# EAGLE board doorduino3 (EAGLE 7.4.0)
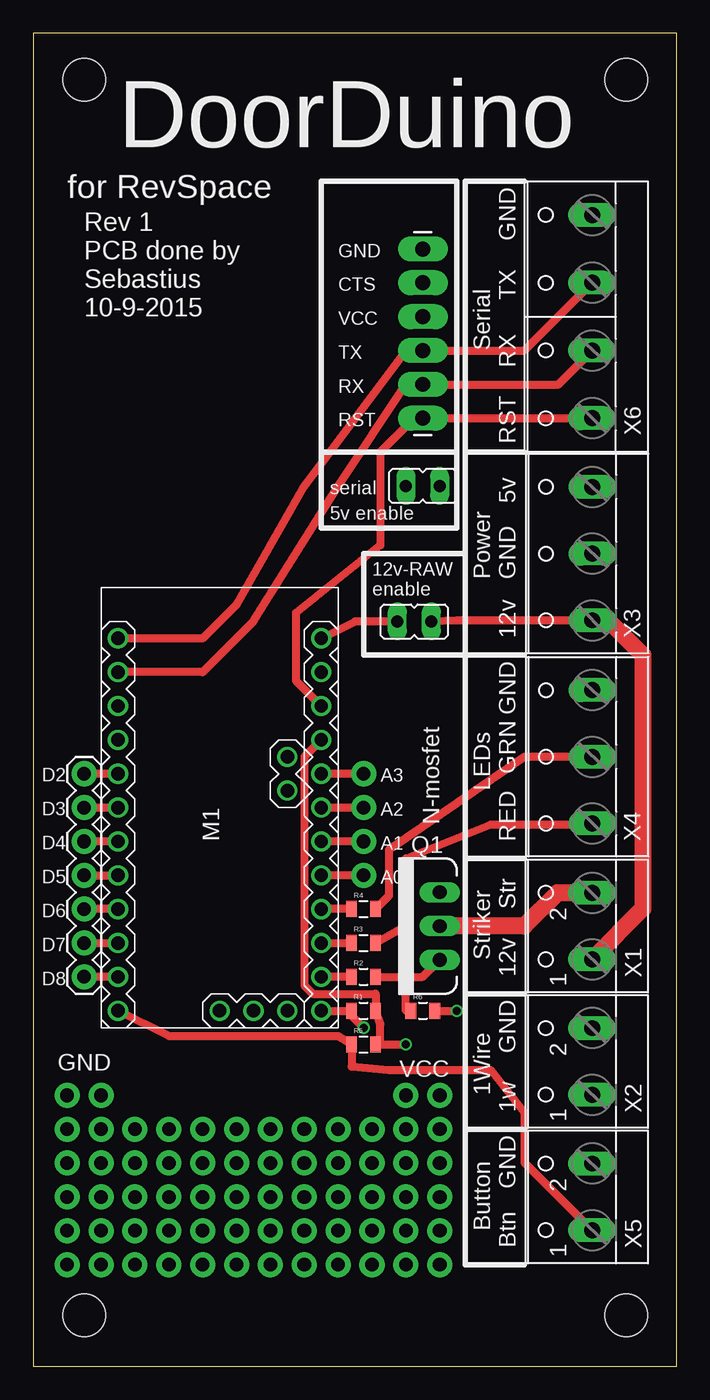
[diagram p0: board, top side]
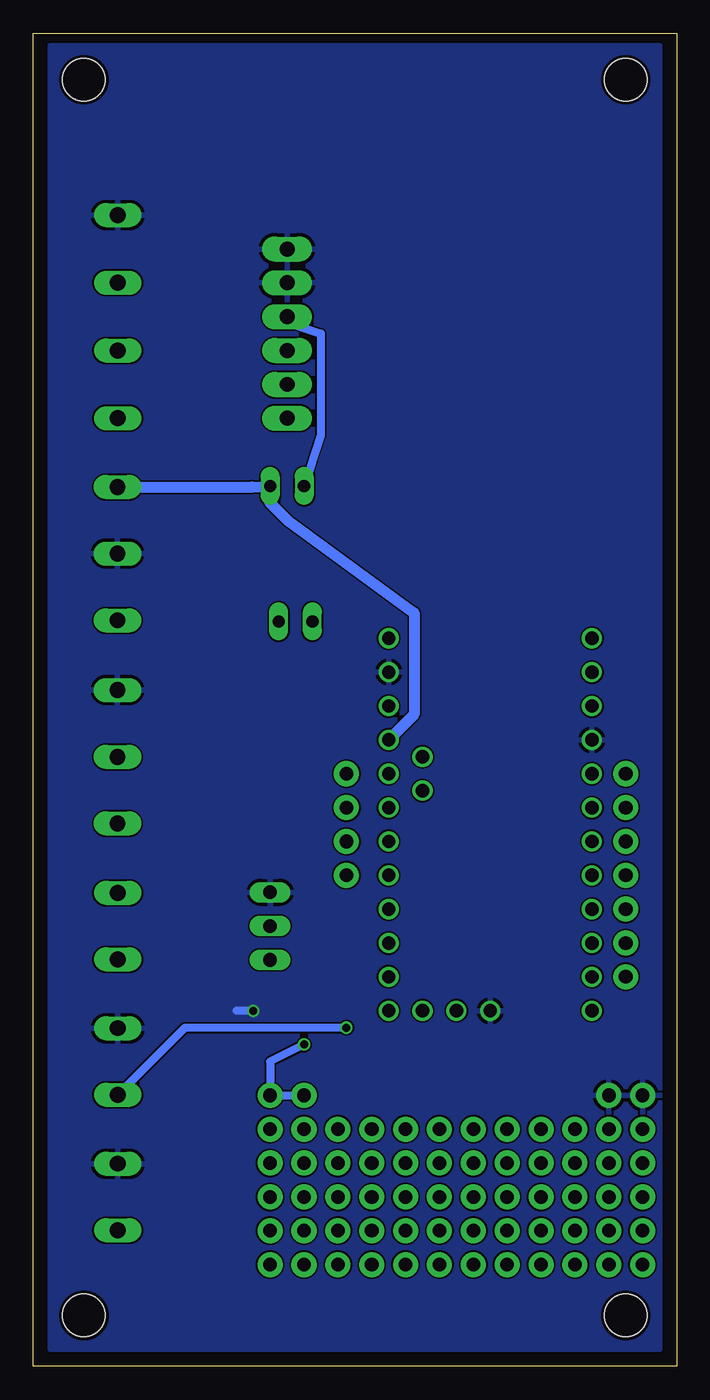
[diagram p1: board, bottom side, seen from below]

Size 48.24 x 100 mm. Coordinates in mm from the lower left corner, seen from the top.
Outline: 0,0 48.24,0 48.24,100 0,100 0,0
Copper layers (1*16): Top 0.035mm / dielectric 1.5mm / Bottom 0.035mm
Design rules "dirt_cheap_dirty_boards.v1": minimum track width 5mil, minimum drill 12mil, track to track 5mil, track to pad 5mil, pad to pad 5mil, via to via 5mil, smd to smd 0mil, copper to edge 10mil, drill to drill 10mil, minimum pad ring 10mil, minimum via ring 6mil, stop-mask expansion 2mil, vias tented up to drill 25mil, thermal gap 10mil
Holes 3.2 mm at 3.81,96.52 44.45,96.52 3.81,3.81 44.45,3.81

## Footprints (pad centres in the part's own frame; a part is rotated, then mirrored left to right if it is on the bottom)
1X02_NO_SILK = drill 1.016 pad 1.88: 1 0,0; 2 2.54,0
JP1 = drill 0.914 long: 1 0,-1.27; 2 0,1.27
1X06_LONGPADS = drill 1.118 pad 1.88 long: 1 0,0; 2 2.54,0; 3 5.08,0; 4 7.62,0; 5 10.16,0; 6 12.7,0
1X12_NO_SILK = drill 1.016 pad 1.88: 1 0,0; 2 2.54,0; 3 5.08,0; 4 7.62,0; 5 10.16,0; 6 12.7,0; 7 15.24,0; 8 17.78,0; 9 20.32,0; 10 22.86,0; 11 25.4,0; 12 27.94,0
1X07 = drill 1.016 pad 1.88: 1 0,0; 2 2.54,0; 3 5.08,0; 4 7.62,0; 5 10.16,0; 6 12.7,0; 7 15.24,0
1X04_NO_SILK_ALL_ROUND = drill 1.016 pad 1.88: 1 0,0; 2 2.54,0; 3 5.08,0; 4 7.62,0
ARDUINO-PRO-MINI#NP = drill 1: J2.1 -1.27,5.08; J2.2 -3.81,5.08; J3.1 15.24,0; J3.2 15.24,2.54; J3.3 15.24,5.08; J6.1 -12.7,7.62; J6.2 -10.16,7.62; J6.3 -7.62,7.62; J6.4 -5.08,7.62; J6.5 -2.54,7.62; J6.6 0,7.62; J6.7 2.54,7.62; J6.8 5.08,7.62; J6.9 7.62,7.62; J6.10 10.16,7.62; J6.11 12.7,7.62; J6.12 15.24,7.62; J7.1 15.24,-7.62; J7.2 12.7,-7.62; J7.3 10.16,-7.62; J7.4 7.62,-7.62; J7.5 5.08,-7.62; J7.6 2.54,-7.62; J7.7 0,-7.62; J7.8 -2.54,-7.62; J7.9 -5.08,-7.62; J7.10 -7.62,-7.62; J7.11 -10.16,-7.62; J7.12 -12.7,-7.62
TO220V = drill 1.016 long: 1 -2.54,0; 2 0,0; 3 2.54,0
0805 = smd 0.8 x 1.2: 1 -0.9,0; 2 0.9,0
W237-102 = drill 1.194 long: 1 -2.5,-1.27; 2 2.5,-1.27
W237-103 = drill 1.194 long: 1 -5,-1.29; 2 0,-1.29; 3 5,-1.29
W237-4P = drill 1.194 long: 1 -7.62,-0.635; 2 -2.54,-0.635; 3 2.54,-0.635; 4 7.62,-0.635

## Placement (x,y rotation side)
GND  [1X02_NO_SILK]  2.54,20.32 0 top
JP1  [JP1]  28.57,55.88 90 top
JP2  SERIAL  [1X06_LONGPADS]  29.21,71.12 90 top
JP3  [JP1]  29.21,66.04 270 top
JP4  [1X12_NO_SILK]  2.54,17.78 0 top
JP5  [1X12_NO_SILK]  2.54,15.24 0 top
JP6  [1X12_NO_SILK]  2.54,12.7 0 top
JP7  [1X12_NO_SILK]  2.54,10.16 0 top
JP8  [1X12_NO_SILK]  2.54,7.62 0 top
JP10  [1X07]  3.81,29.21 90 top
JP11  [1X04_NO_SILK_ALL_ROUND]  24.77,44.45 270 top
M1  ARDUINO-PRO-MINI-5.0V#NP  [ARDUINO-PRO-MINI#NP]  13.97,41.91 270 top
Q1  N-Mosfet  [TO220V]  30.48,33.02 90 top
R1  [0805]  24.77,26.67 0 top
R2  [0805]  24.77,29.21 0 top
R3  [0805]  24.77,31.75 0 top
R4  [0805]  24.77,34.29 0 top
R5  [0805]  24.77,24.13 0 top
R6  [0805]  29.21,26.67 0 top
VCC  [1X02_NO_SILK]  30.48,20.32 180 top
X1  STRIKER  [W237-102]  40.64,33.02 90 top
X2  1WIRE  [W237-102]  40.64,22.86 90 top
X3  Power  [W237-103]  40.64,60.96 90 top
X4  LEDS  [W237-103]  40.64,45.72 90 top
X5  BUTTON  [W237-102]  40.64,12.7 90 top
X6  [W237-4P]  41.27,78.74 90 top

## Library data of the parts
GND JP2 JP4-JP8 JP10 JP11 VCC = SparkFun-Connectors
JP1 JP3 = jumper
M1 = diy-modules
Q1 = SparkFun-DiscreteSemi; PROD_ID: TRANS-10060
R1-R6 = SparkFun-Passives
X1 X2 X5 = con-wago-500; MPN: 237-102; OC_FARNELL: unknown; OC_NEWARK: 70K9898
X3 X4 = con-wago-500; MPN: 237-103; OC_FARNELL: unknown; OC_NEWARK: 18M7116
X6 = con-wago-508; OC_FARNELL: unknown; OC_NEWARK: unknown

## Nets
+12V: JP1.1 X1.1 X3.1
GND: GND.1 GND.2 JP2.5 JP2.6 M1.J3.1 M1.J6.2 M1.J7.9 Q1.3 R6.2 X2.2 X3.2 X4.3 X5.2 X6.4
N$1: JP1.2 M1.J6.1
N$2: M1.J6.12 R1.1 X2.1
N$3: M1.J6.11 R2.1
N$4: Q1.1 R2.2 R6.1
N$5: Q1.2 X1.2
N$6: M1.J6.10 R3.1
N$7: M1.J6.9 R4.1
N$8: R3.2 X4.1
N$9: R4.2 X4.2
N$10: M1.J7.1 R5.1 X5.1
N$11: JP2.3 M1.J7.12 X6.3
N$12: JP2.2 M1.J7.11 X6.2
N$13: JP2.4 JP3.1
N$14: JP2.1 M1.J6.3 X6.1
N$15: JP10.1 M1.J7.2
N$16: JP10.2 M1.J7.3
N$17: JP10.3 M1.J7.4
N$18: JP10.4 M1.J7.5
N$19: JP10.5 M1.J7.6
N$20: JP10.6 M1.J7.7
N$21: JP10.7 M1.J7.8
N$22: JP11.1 M1.J6.5
N$23: JP11.2 M1.J6.6
N$24: JP11.3 M1.J6.7
N$25: JP11.4 M1.J6.8
VCC: JP3.2 M1.J6.4 R1.2 R5.2 VCC.1 VCC.2 X3.3

## Tracks (layer width: path | path; a pad name or v marks a point on that pad's centre or on a via)
+12V
  Top 0.61: X3.1 31.83,55.96 JP1.1
  Top 1.27: X3.1 43.1,55.96 45.72,53.34 45.72,34.33 X1.1
GND  (via drill 0.6)
  Top 0.61: R6.2 v31.75,26.67
  Bottom 0.61: v31.75,26.67 33.02,26.67
  pour Bottom: 1.27,99.06 46.99,99.06 46.99,1.27 1.27,1.27
N$1
  Top 0.61: JP1.2 24.13,55.88 M1.J6.1
N$2  (via drill 0.6)
  Top 0.61: v24.77,25.4 23.86,26.3 R1.1 M1.J6.12
  Bottom 0.61: v24.77,25.4 36.87,25.4 X2.1
N$3
  Top 0.61: R2.1 M1.J6.11
N$4
  Top 0.61: R2.2 27.94,29.21 | 27.94,29.21 29.21,29.21 Q1.1 | R6.1 27.94,26.67 27.94,29.21
N$5
  Top 1.27: X1.2 39.33,35.52 36.83,33.02 Q1.2
N$6
  Top 0.61: M1.J6.10 R3.1
N$7
  Top 0.61: R4.1 M1.J6.9
N$8
  Top 0.61: R3.2 27.94,33.02 27.94,38.1 34.29,40.64 41.85,40.64 X4.1
N$9
  Top 0.61: X4.2 36.83,45.72 26.67,38.73 26.67,35.3 R4.2
N$10
  Top 0.61: X5.1 36.83,15.28 36.83,19.05 34.29,22.23 26.67,22.23 23.86,22.49 R5.1 22.86,24.77 10.16,24.77 M1.J7.1
N$11
  Top 0.61: X6.3 36.83,76.2 JP2.3 27.94,76.2 20.32,66.04 15.24,57.15 12.7,54.61 M1.J7.12
N$12
  Top 0.61: X6.2 39.37,73.66 JP2.2 27.94,73.66 22.86,66.04 16.51,55.88 12.7,52.07 M1.J7.11
N$13
  Bottom 0.61: JP2.4 30.48,78.74 26.67,77.47 26.67,69.85 JP3.1
N$14
  Top 0.61: X6.1 JP2.1 28.57,71.12 26.04,68.58 26.04,61.59 19.68,56.52 19.68,51.44 M1.J6.3
N$15
  Top 0.61: M1.J7.2 JP10.1
N$16
  Top 0.61: JP10.2 M1.J7.3
N$17
  Top 0.61: M1.J7.4 JP10.3
N$18
  Top 0.61: JP10.4 M1.J7.5
N$19
  Top 0.61: M1.J7.6 JP10.5
N$20
  Top 0.61: JP10.6 M1.J7.7
N$21
  Top 0.61: M1.J7.8 JP10.7
N$22
  Top 0.61: JP11.1 M1.J6.5
N$23
  Top 0.61: M1.J6.6 JP11.2
N$24
  Top 0.61: JP11.3 M1.J6.7
N$25
  Top 0.61: JP11.4 M1.J6.8
VCC  (via drill 0.6)
  Top 0.61: R5.2 26.04,24.13 | 26.04,24.13 26.04,25.66 R1.2 25.66,27.94 20.95,27.94 20.32,28.57 20.32,45.72 M1.J6.4 | 26.04,24.13 v27.94,24.13
  Bottom 0.61: v27.94,24.13 30.48,22.86 VCC.1 VCC.2
  Bottom 0.813: X3.3 31.83,65.96 JP3.2 30.48,64.77 29.21,63.5 19.68,56.52 19.68,48.9 M1.J6.4

## Text on the board
tNames: DoorDuino | for RevSpace | GND | TX | Rev 1 / PCB done by / Sebastius / 10-9-2015 | Serial | RX | GND / CTS / VCC / TX / RX / RST | RST | serial | 5v | 5v enable | Power | GND | 12v-RAW / enable | 12v | GND | GRN | LEDs | N-mosfet | RED | A3 / A2 / A1 / A0 | Str | Striker | D2 / D3 / D4 / D5 / D6 / D7 / D8 | 12v | GND | 1Wire | 1w | GND | Button | Btn